# Altium PCB 2019-02-23_13-47-08.PcbDoc
Units mil, origin at the board's own origin, x right, y up, seen from the top; angles counter-clockwise.
Board outline 3037 x 1712 mil, 4 copper layers (Top Layer, MidLayer1, MidLayer2, Bottom Layer); 15 components, 7 nets, 31 pads, 70 vias.
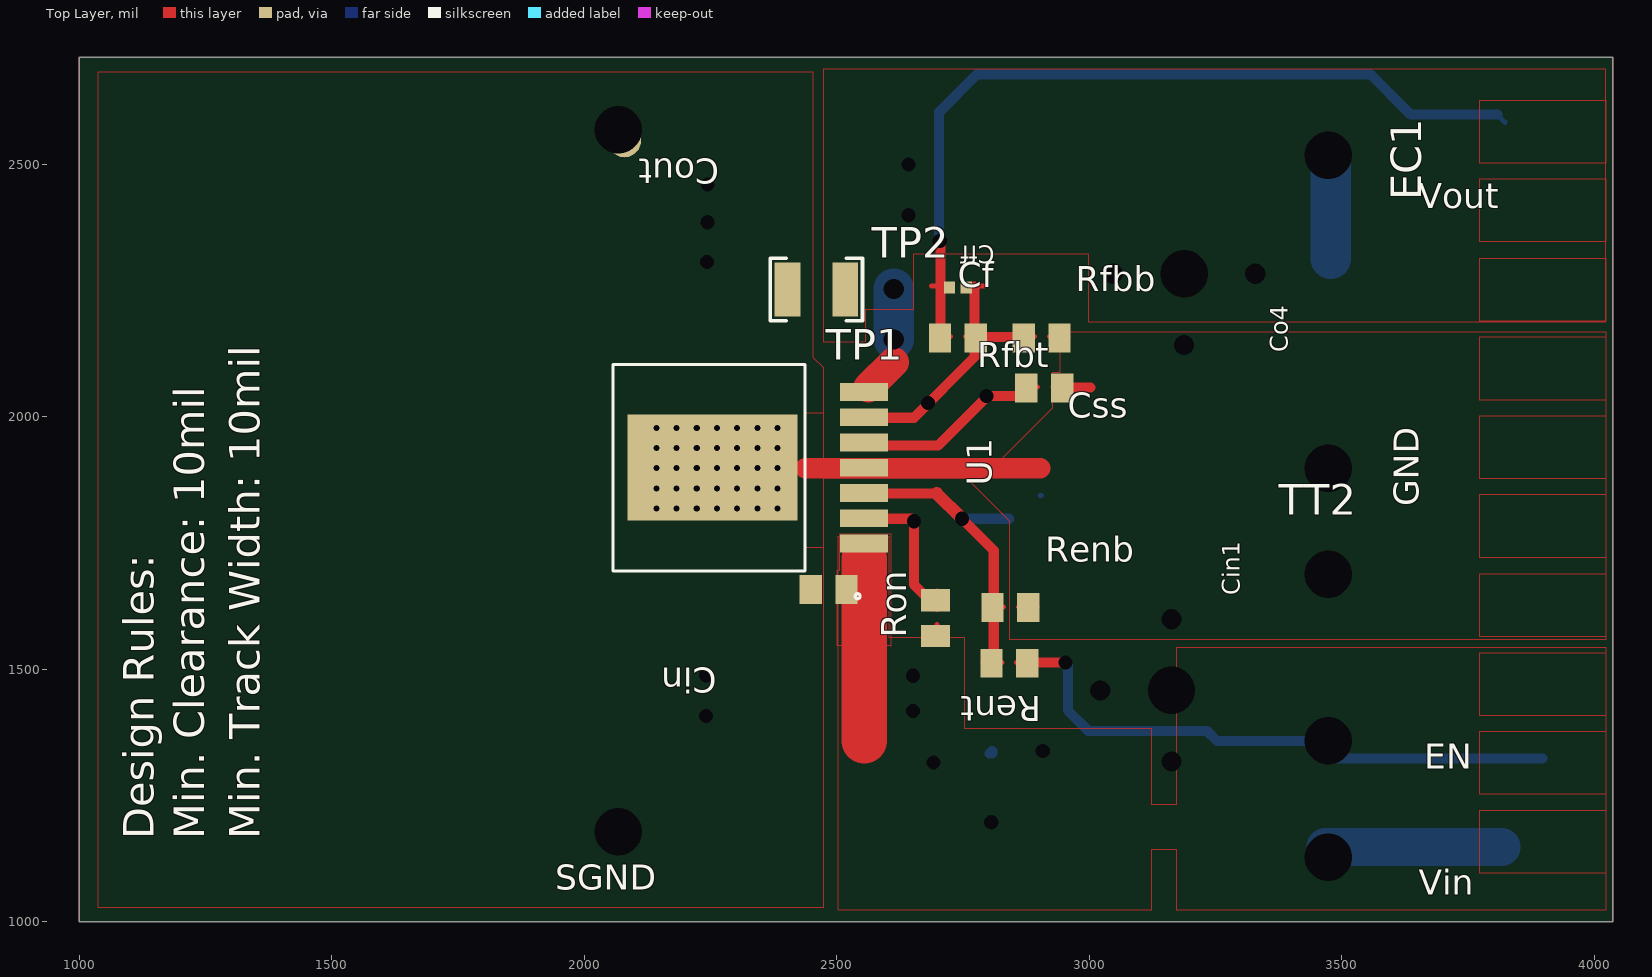
[diagram p0: Top Layer view]
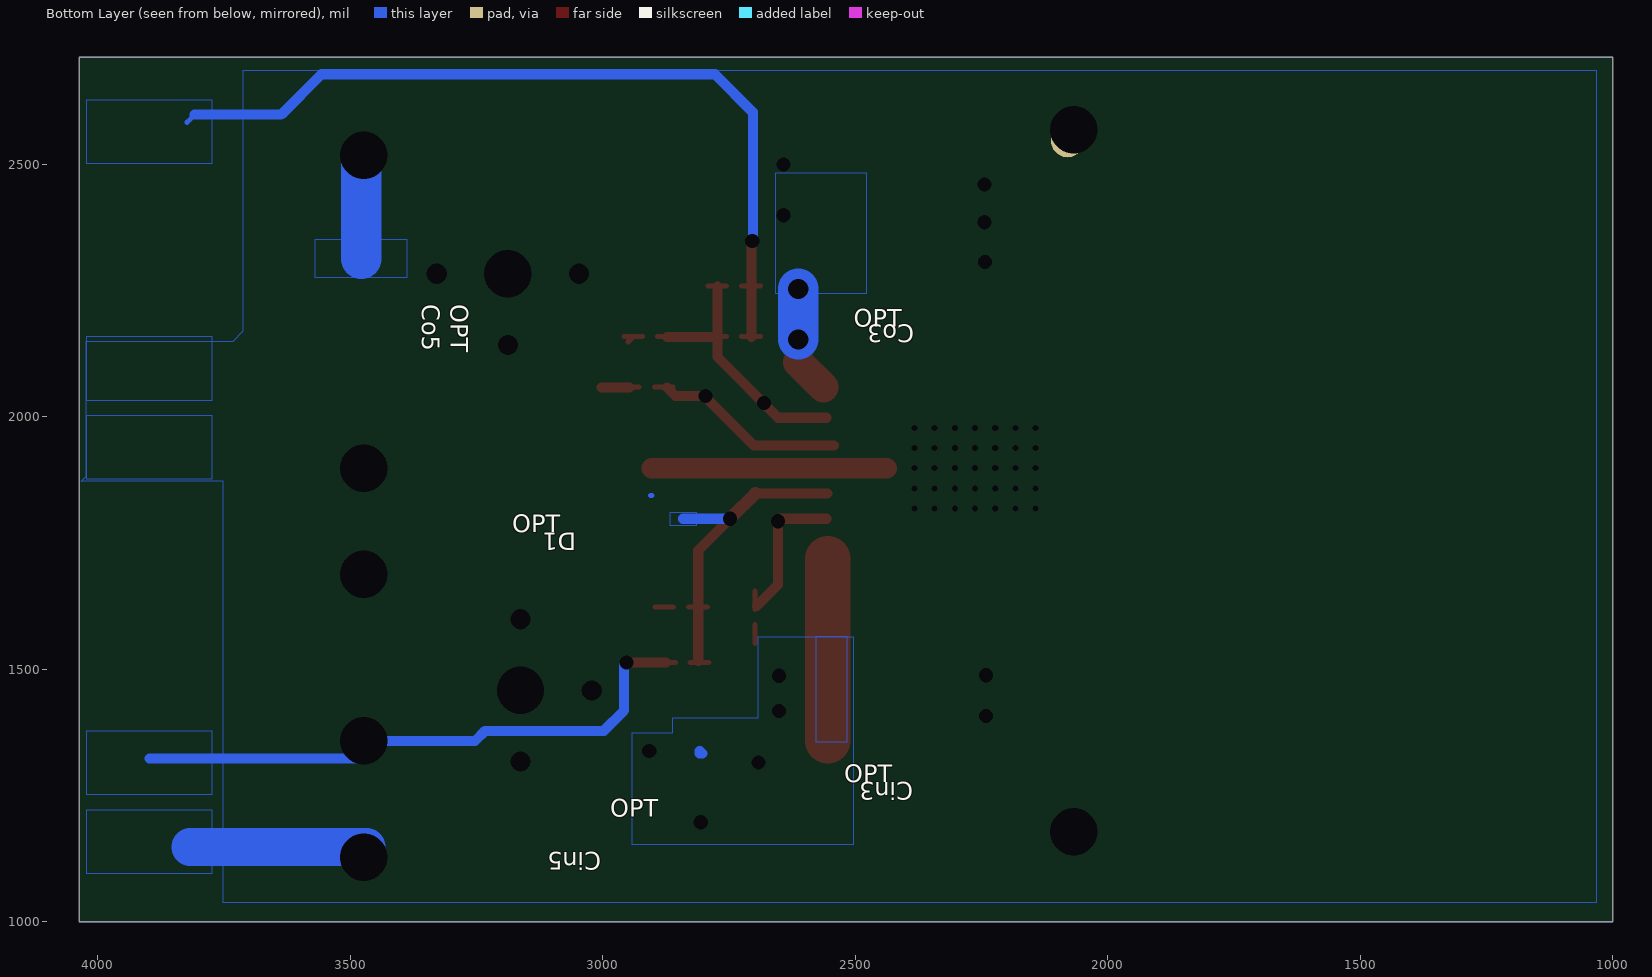
[diagram p1: Bottom Layer view, seen from below]

## Layer stack, top to bottom
Top Layer: signal copper 1.4
Dielectric: core 12.6, FR-4, Dk 4.8
MidLayer1: signal copper 1.4
Dielectric: prepreg 12.6, FR-4, Dk 4.8
MidLayer2: signal copper 1.4
Dielectric: core 12.6, FR-4, Dk 4.8
Bottom Layer: signal copper 1.4

## Board outline
1000,1000 4037,1000 4037,2712 1000,2712

## Design rules (kind name [scope] priority, off if disabled: settings)
PlaneConnect [All] p0: scope1count=1 scope1_0_kind=Board scope1_0_value=Board scope2count=1 scope2_0_kind=Board scope2_0_value=Board commentlength=0 planeconnectstyle=Direct reliefexpansion=20 reliefentries=4 reliefconductorwidth=10 reliefairgap=10
PlaneConnect [All] p1: planeconnectstyle=Direct reliefexpansion=20 reliefentries=4 reliefconductorwidth=10 reliefairgap=10
PolygonConnect [All] p0: scope1count=1 scope1_0_kind=Board scope1_0_value=Board scope2count=1 scope2_0_kind=Board scope2_0_value=Board commentlength=0 connectstyle=Direct reliefconductorwidth=10 reliefentries=4 polygonreliefangle="90 Angle"
PolygonConnect [All] p1: connectstyle=Direct reliefconductorwidth=10 reliefentries=4 polygonreliefangle="90 Angle"

## Components (designator, comment, footprint, x,y, rotation, side; value= is the part's Value field where it differs from the comment)
Cf "" 0402 2740,2256 r0 top
Cin "" 0805 2484,1658 r180 top
Cout "" 1210_270 2460,2252 r180 top
Css "" 0805 2911,2057 r0 top
EN "" TP-1502 3471,1357 r0 top
GND "" TP-1502 3466,1897 r90 top
Renb "" 0805 2844,1622 r0 top
Rent "" 0805 2842,1512 r180 top
Rfbb "" 0805 2906,2156 r0 top
Rfbt "" 0805 2740,2156 r0 top
Ron "" 0805 2696,1601 r90 top
SGND "" TP-1502 2080,2546 r0 top
U1 "" TZA07A 2344,1899 r90 top
Vin "" TP-1502 3471,1126 r0 top
Vout "" TP-1502 3471,2517 r0 top

## Footprints (in the part's own frame and the unit in brackets; to place one, negate y for a bottom-side part, rotate by r counter-clockwise, add the part's x,y. Pads: shape width x height; smd on the part's side, far side on the other; paste and mask are expansions set on the pad)
0402 [mil]
  rect 22x24 smd: 1(-16.5,0) 2(16.5,0)
0805 [mil]
  rect 44x57 smd: 1(-35.5,0) 2(35.5,0)
1210_270 [mm]
  rect 1.3x2.7 smd: 1(-1.45,0) 2(1.45,0)
  silkscreen extent -2.32,-1.57 2.32,1.57
TP-1502 [mil]
  round 65 / inner round 0 / far side round 65 hole 32: 1(0,0)
TZA07A [mil]
  rect 35x95 smd: 1(-150,-210.25) 2(-100,-210.25) 3(-50,-210.25) 4(0,-210.25) 5(50,-210.25) 6(100,-210.25) 7(150,-210.25)
  rect 210x336 smd: 8(0,89.75)
  silkscreen extent -259,-202 204,287

## Via types
v1: diameter 0, hole 12, Top Layer to Bottom Layer, 35 vias
v2: diameter 0, hole 28, Top Layer to Bottom Layer, 18 vias
v3: diameter 0, hole 94, Top Layer to Bottom Layer, 9 vias
v4: diameter 0, hole 40, Top Layer to Bottom Layer, 8 vias

## Nets (pads, with @x,y where several pads share a name; then routed paths per layer and width w, separated by ;. In a path a pad name is that pad's centre, name@x,y a point inside that pad or via, vN(x,y) a via of type N, cw(c..) or ccw(c..) an arc to the next point about the centre after c; other vN are vias at no path point)
0: Cin.2 Cout.2 Css.2 GND.1 Renb.2 Rfbb.2 SGND.1 U1.4 U1.8 | length 649.1
  Top Layer w10: Renb.2@2860,1623.5 Renb.2@2897,1623.5 ; Rfbb.2@2921,2158.5 Rfbb.2@2958,2158.5 ; Css.2@2928,2058.5 Css.2@2965,2058.5 ; Rfbb.2@2940,2158 Rfbb.2@2950,2148
  Top Layer w20: Css.2@2947,2058 3003,2058
  Top Layer w40: 2438,1898 2903,1898
  Bottom Layer w10: 2903,1844 2906,1844
  other v1: 2143,1818 2183,1818 2223,1818 2263,1818 2303,1818 2343,1818 2383,1818 2143,1858 2183,1858 2223,1858 2263,1858 2303,1858 2343,1858 2383,1858 2143,1898 2183,1898 2223,1898 2263,1898 2303,1898 2343,1898 2383,1898 2143,1938 2183,1938 2223,1938 2263,1938 2303,1938 2343,1938 2383,1938 2143,1978 2183,1978 2223,1978 2263,1978 2303,1978 2343,1978 2383,1978
  other v2: 2241,1407 2241,1488 2243,2306 2244,2385 2244,2460
  other v3: 2068,1178 3473,1688 3473,1898 2068,2568
  other v4: 3163,1317 3022,1458 3163,1599 3188,2142 3047,2283 3329,2283
1: Renb.1 Rent.2 U1.3 | length 698.8
  Top Layer w10: Rent.2@2790,1513.5 Rent.2@2827,1513.5 ; Renb.1@2793,1623.5 Renb.1@2830,1623.5
  Top Layer w20: U1.3@2555,1848 2557,1848 2698,1848 2688,1848 ; v2(2748,1798) 2811,1735 2811,1623 Rent.2@2811,1516
  Top Layer w25: 2698,1848 v2(2748,1798)
  Bottom Layer w20: v2(2748,1798) 2841,1798
2: Cin.1 EN.1 Rent.1 Ron.1 U1.1 Vin.1 | length 1961.6
  Top Layer w10: Ron.1@2698.5,1551 2698.5,1588 ; Rent.1@2856,1513.5 Rent.1@2893,1513.5
  Top Layer w20: Rent.1@2875,1513 v2(2953,1513)
  Top Layer w90: 2555,1358 2555,1719
  Bottom Layer w10: 3822,1178 3823,1177
  Bottom Layer w20: 2803,1333 2808,1333 2808,1338 ; v2(2953,1513) 2958,1508 2958,1418 2998,1378 3233,1378 3253,1358 v3(3473,1358) ; Vin.1@3458,1103 Vin.1@3473,1118 ; 3468,1323 3898,1323
  Bottom Layer w75: Vin.1@3468,1148 3817,1148
  other v2: 2806,1197 2692,1315 2908,1338 2651,1417 2651,1487
  other v3: 3473,1128 3163,1458
3: Cf.1 Cout.1 Rfbt.1 U1.7 Vout.1 | length 2112.6
  Top Layer w10: U1.7@2563,2048 U1.7@2563,2058 ; 2613,2108 2613,2118 ; Rfbt.1@2688,2158.5 Rfbt.1@2725,2158.5 ; 2688,2258.5 Cf.1@2725,2258.5 ; 2698,2348 2706,2340
  Top Layer w20: Rfbt.1@2706,2158 2706,2258 2706,2340
  Top Layer w60: U1.7@2563,2058 2613,2108
  Bottom Layer w10: 3808,2598 3823,2583 3813,2593
  Bottom Layer w20: 2703,2353 2703,2603 2778,2678 3557,2678 3637,2598 3808,2598
  Bottom Layer w80: v4(2613,2153) v4(2613,2253) ; 3478,2313 Vout.1@3478,2513
  other v2: 2704,2348 2642,2399 2642,2499
  other v3: 3188,2283 3473,2518
4: Cf.2 Rfbb.1 Rfbt.2 U1.6 | length 616.7
  Top Layer w10: Rfbt.2@2755,2158.5 Rfbt.2@2792,2158.5 ; Cf.2@2755,2258.5 2792,2258.5 ; Rfbb.1@2855,2158.5 Rfbb.1@2892,2158.5
  Top Layer w20: U1.6@2557,1998 2653,1998 2773,2118 Rfbt.2@2773,2158 ; 2773,2258 Rfbt.2@2773,2158 ; Rfbb.1@2873,2158 Rfbt.2@2773,2158
  other v2: 2681,2027
5: Css.1 U1.5 | length 423.3
  Top Layer w10: U1.5@2557,1948 U1.5@2562,1943 ; Css.1@2861,2058.5 2898,2058.5
  Top Layer w20: U1.5@2542,1943 2701,1943 2798,2040 ; v2(2797,2041) 2856,2041 Css.1@2873,2058
6: Ron.2 U1.2 | length 313.1
  Top Layer w10: Ron.2@2698.5,1618 Ron.2@2698.5,1655
  Top Layer w20: U1.2@2557,1798 2648,1798 ; v2(2653,1793) 2653,1668 Ron.2@2695,1625

## Polygon pours and split planes (outlines as drawn)
2 on Top Layer " " (solid, pour order 0): 2506,1768 2607,1768 2607,1545 2606,1546 2501,1546 2501,1696 2506,1696
2 on Top Layer " " (solid, pour order 1): 3773,1096 3773,1221 4023,1221 4023,1096
2 on Top Layer " " (solid, pour order 2): 3773,1252 3773,1377 4023,1377 4023,1252
2 on Top Layer " " (solid, pour order 3): 3773,1408 3773,1533 4023,1533 4023,1408
3 on Top Layer " " (solid, pour order 4): 3773,2189 3773,2314 4023,2314 4023,2189
3 on Top Layer " " (solid, pour order 5): 3773,2346 3773,2471 4023,2471 4023,2346
3 on Top Layer " " (solid, pour order 6): 3773,2502 3773,2627 4023,2627 4023,2502
2 on Top Layer " " (solid, pour order 20): 2503,1023 2503,1763 2603,1763 2603,1563 2753,1563 2753,1383 3123,1383 3123,1233 3173,1233 3173,1543 4023,1543 4023,1023 3173,1023 3173,1143 3123,1143 3123,1023
3 on Top Layer " " (solid, pour order 21): 2473,2148 2558,2148 2558,2213 2653,2213 2653,2323 2998,2323 2998,2188 4023,2188 4023,2688 2473,2688
0 on Top Layer " " (solid, pour order 22): 2438,1740 2438,2008 2473,2008 2473,1740
0 on Top Layer " " (solid, pour order 23): 3773,1564 3773,1689 4023,1689 4023,1564
0 on Top Layer " " (solid, pour order 24): 3773,1721 3773,1846 4023,1846 4023,1721
0 on Top Layer " " (solid, pour order 25): 3773,1877 3773,2002 4023,2002 4023,1877
0 on Top Layer " " (solid, pour order 26): 3773,2033 3773,2158 4023,2158 4023,2033
0 on Top Layer " " (solid, pour order 32): 1038,1028 1038,2683 2453,2683 2453,2118 2473,2098 2473,1918 2828,1918 2928,2018 2928,2088 2943,2088 2943,2168 4023,2168 4023,1558 2843,1558 2843,1793 2758,1878 2473,1878 2473,1028
2 on Bottom Layer " " (solid, pour order 7): 2516,1356 2516,1564 2578,1564 2578,1356
2 on Bottom Layer " " (solid, pour order 8): 3773,1096 3773,1221 4023,1221 4023,1096
2 on Bottom Layer " " (solid, pour order 9): 3773,1252 3773,1377 4023,1377 4023,1252
3 on Bottom Layer " " (solid, pour order 15): 3773,2502 3773,2627 4023,2627 4023,2502
3 on Bottom Layer " " (solid, pour order 16): 3387,2276 3387,2350 3570,2350 3570,2276
1 on Bottom Layer " " (solid, pour order 17): 2814,1785 2814,1810 2867,1810 2867,1785
2 on Bottom Layer " " (solid, pour order 18): 2503,1153 2503,1563 2693,1563 2693,1403 2863,1403 2863,1373 2943,1373 2943,1153
3 on Bottom Layer " " (solid, pour order 19): 2478,2483 2478,2243 2658,2243 2658,2483
0 on Bottom Layer " " (solid, pour order 27): 3773,1877 3773,2002 4023,2002 4023,1877
0 on Bottom Layer " " (solid, pour order 28): 3773,2033 3773,2158 4023,2158 4023,2033
0 on Bottom Layer " " (solid, pour order 31): 1033,2686 1033,1038 3752,1038 3752,1872 4033,1872 4023,1882 4023,2149 3732,2149 3712,2170 3712,2686
0 on MidLayer2 " " (solid, pour order 29): 3753,1033 3753,1873 3753,2143 3713,2143 3713,2693 1033,2693 1033,1033
0 on MidLayer1 " " (solid, pour order 30): 1033,1033 3753,1033 3753,1873 4023,1873 4023,2143 3713,2143 3713,2693 1033,2693

## Other copper
Multi-Layer:
  the board outline again, w1

## Silkscreen, mask and mechanical layers (free items; w line width, h text height)
Top Overlay:
  text "EC1" at 3658,2429 h60 r90
  text "Cff" at 2813,2338 h35 r180
  text "TP2" at 2569,2315 h60
  text "Co4" at 3393,2128 h35 r90
  text "TP1" at 2478,2113 h60
  text "TT2" at 3375,1806 h60
  text "Cin1" at 3298,1646 h35 r90
  text "Design Rules:" at 1148,1163 h60 r90
  text "Min. Clearance: 10mil" at 1248,1163 h60 r90
  text "Min. Track Width: 10mil" at 1358,1163 h60 r90
Bottom Overlay:
  text "OPT" at 3301,2223 h35 r90
  text "Co5" at 3358,2223 h35 r90
  text "Co3" at 2383,2182 h35 r180
  text "OPT" at 2503,2178 h35
  text "OPT" at 3179,1771 h35
  text "D1" at 3053,1770 h35 r180
  text "Cin3" at 2385,1276 h35 r180
  text "OPT" at 2522,1276 h35
  text "OPT" at 2985,1208 h35
  text "Cin5" at 3003,1138 h35 r180